# EAGLE board Main Board (EAGLE 9.0.0)
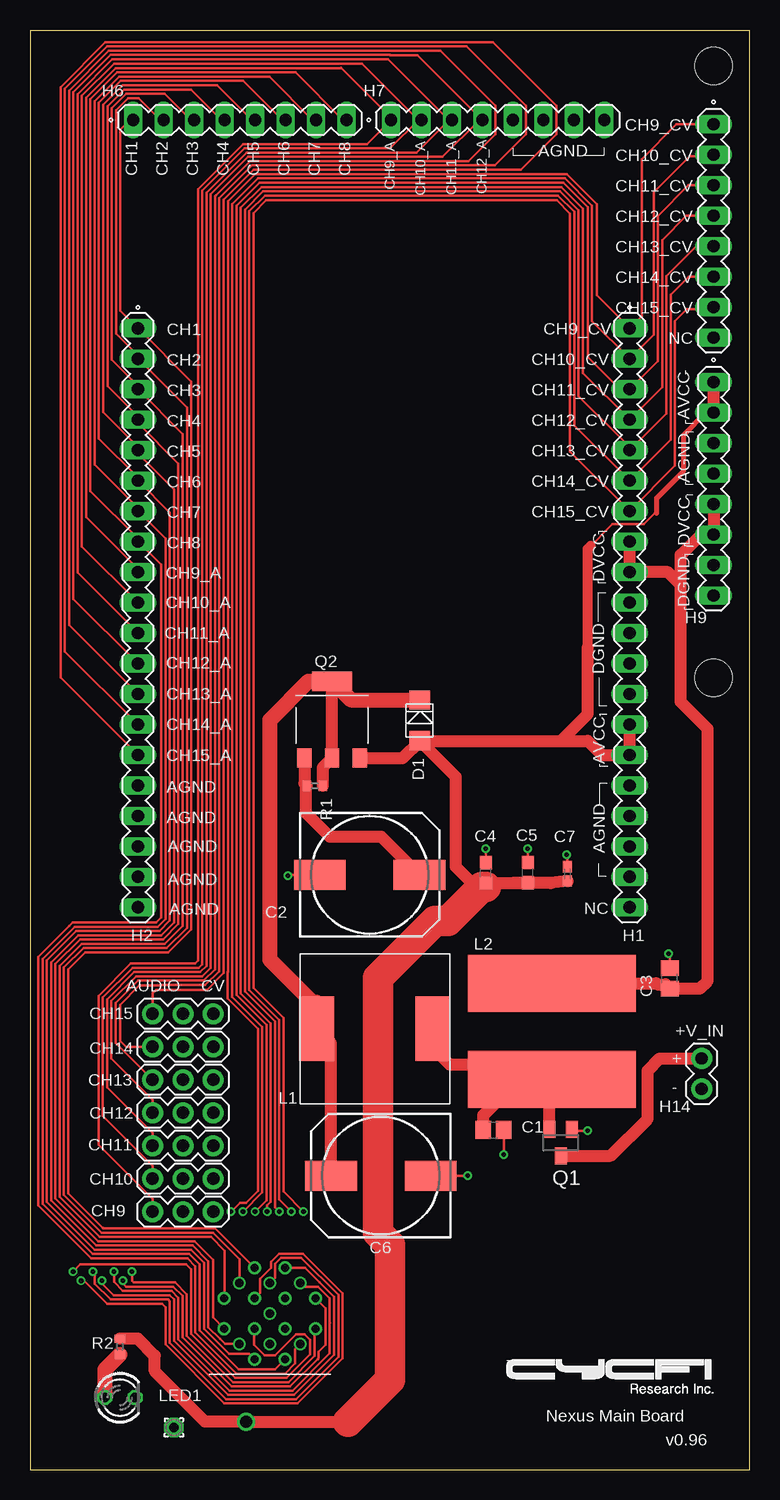
[diagram p0: board, top side]
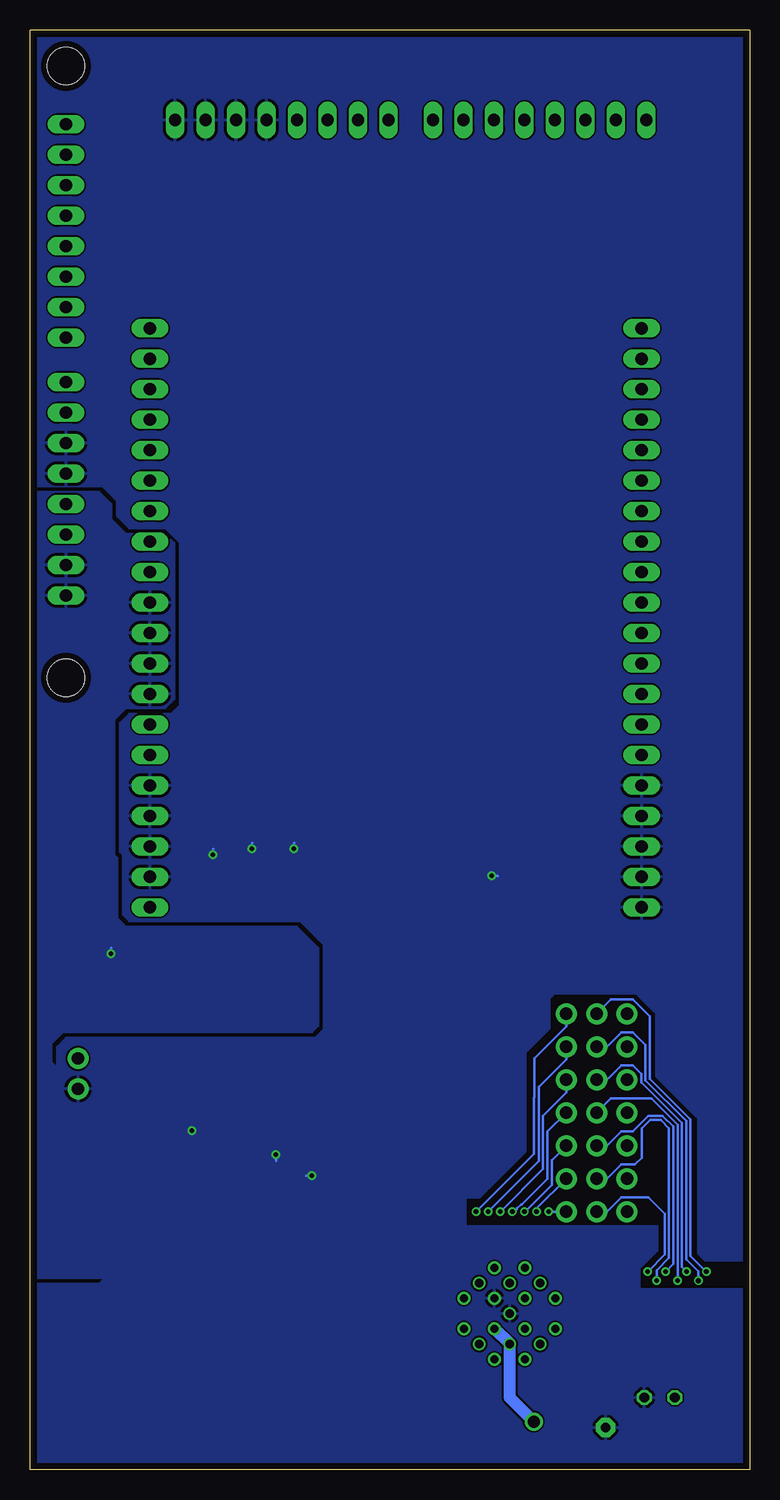
[diagram p1: board, bottom side, seen from below]

Size 60 x 120 mm. Coordinates in mm from the lower left corner, seen from the top.
Outline: 0,0 60,0 60,120 0,120 0,0
Copper layers (1*16): Top 0.035mm / dielectric 1.6mm / Bottom 0.035mm
Design rules "Elecrow_2-layer_PCB_eagle_rule": minimum track width 6mil, minimum drill 12mil, track to track 6mil, track to pad 6mil, pad to pad 6mil, via to via 8mil, smd to smd 0mil, copper to edge 20mil, drill to drill 10mil, minimum pad ring 6mil, minimum via ring 6mil, stop-mask expansion 0mil, vias tented up to drill 100mil, thermal gap 10mil
Holes 3.1 mm at 57,117 57,66

## Footprints (pad centres in the part's own frame; a part is rotated, then mirrored left to right if it is on the bottom)
C0805 = smd 1.3 x 1.5: 1 -0.85,0; 2 0.85,0
140CLH-1010 = smd 4.3 x 2.5: + 4.15,0; - -4.15,0
C0603 = smd 1.1 x 1: 1 -0.85,0; 2 0.85,0
C0402K = smd 0.925 x 0.74: 1 -0.6,0; 2 0.6,0
19PIN_LEMO = drill 0.7: P$1 -3.81,-1.27; P$2 -2.54,-2.54; P$3 -1.27,-3.81; P$4 1.27,-3.81; P$5 2.54,-2.54; P$6 3.81,-1.27; P$7 3.81,1.27; P$8 2.54,2.54; P$9 1.27,3.81; P$10 -1.27,3.81; P$11 -2.54,2.54; P$12 -3.81,1.27; P$13 -2.54,0; P$14 -1.27,-1.27; P$15 1.27,-1.27; P$16 2.54,0; P$17 1.27,1.27; P$18 -1.27,1.27; P$19 0,0
SMX = smd 1.6 x 1.68: ANODE 0,0; CATHODE 3.4,0
TH-PAD-1.6/0.8 = drill 0.813 pad 1.6 octagon: 1 0,0
MA20-1 = drill 1.016 long: 1 -24.13,0; 2 -21.59,0; 3 -19.05,0; 4 -16.51,0; 5 -13.97,0; 6 -11.43,0; 7 -8.89,0; 8 -6.35,0; 9 -3.81,0; 10 -1.27,0; 11 1.27,0; 12 3.81,0; 13 6.35,0; 14 8.89,0; 15 11.43,0; 16 13.97,0; 17 16.51,0; 18 19.05,0; 19 21.59,0; 20 24.13,0
MA03-1_ = drill 1.016 pad 1.75: 1 -2.54,0; 2 0,0; 3 2.54,0
MA08-1 = drill 1.016 long: 1 -8.89,0; 2 -6.35,0; 3 -3.81,0; 4 -1.27,0; 5 1.27,0; 6 3.81,0; 7 6.35,0; 8 8.89,0
MA02-1 = drill 1.016 pad 1.75: 1 -1.27,0; 2 1.27,0
SDR = smd 4.75 x 14: P$1 -4,-0.5; P$2 4,-0.5
L1280 = smd 2.9 x 5.4: P$1 -4.85,0; P$2 4.85,0
LED3MM = drill 0.813 octagon: A -1.27,0; K 1.27,0
SOT23 = smd 1 x 1.4: 1 -0.95,-1.1; 2 0.95,-1.1; 3 0,1.1
SOT-223-4 = smd 1.2 x 1.6: P$1 -2.3,-3.2; P$2 0,-3.2; P$3 2.3,-3.2 | smd 3.3 x 1.6: P$4 0,3.2
R0402 = smd 0.7 x 0.9: 1 -0.65,0; 2 0.65,0

## Placement (x,y rotation side)
C1  22uF  [C0805]  38.65,28.32 0 top
C2  470uF  [140CLH-1010]  28.33,49.57 0 top
C3  22uF  [C0805]  53.34,40.95 90 top
C4  1uF  [C0603]  38.01,49.74 90 top
C5  10uF  [C0603]  41.5,49.76 90 top
C6  1000uF  [140CLH-1010]  29.25,24.5 180 top
C7  1nF  [C0402K]  44.82,49.65 90 top
CN1  19PIN_LEMO  [19PIN_LEMO]  20,13 270 top
D1  FM4004W  [SMX]  32.5,60.75 90 top
GND  [TH-PAD-1.6/0.8]  12,3.5 0 top
H1  [MA20-1]  50,71 270 top
H2  [MA20-1]  9,71 270 top
H3  [MA03-1_]  12.75,32.5 0 top
H4  [MA03-1_]  12.75,35.25 0 top
H5  [MA03-1_]  12.75,38 0 top
H6  [MA08-1]  17.5,112.5 0 top
H7  [MA08-1]  39,112.5 0 top
H8  [MA08-1]  57,103.25 270 top
H9  [MA08-1]  57,81.75 270 top
H10  [MA03-1_]  12.75,21.5 0 top
H11  [MA03-1_]  12.75,24.25 0 top
H12  [MA03-1_]  12.75,27 0 top
H13  [MA03-1_]  12.75,29.75 0 top
H14  MA02-1  [MA02-1]  56,33 90 top
L1  1mH  [SDR]  43.02,36.52 90 top
L2  82uH  [L1280]  28.75,36.75 180 top
LED1  [LED3MM]  7.5,6 0 top
Q1  DMP3099L  [SOT23]  44.25,27.25 180 top
Q2  DSS6060  [SOT-223-4]  25.19,62.51 0 top
R1  1k  [R0402]  23.75,57 0 top
R2  4.7k  [R0402]  7.5,10.25 270 top

## Library data of the parts
C1-C7 L2 R1 R2 = resistor
CN1 GND = CYCFI_Con
D1 = CYCFI_diode
H1 H2 H6-H9 = con-lstb; OC_FARNELL: unknown; OC_NEWARK: unknown
H3-H5 H10-H14 = con-lstb
L1 = inductors
LED1 = led
Q1 Q2 = CYCFI_semicon

## Nets
+AVCC: C4.1 C5.1 C7.1 CN1.P$16 CN1.P$17 D1.ANODE H1.14 H1.15 H9.1 H9.2 Q2.P$3 R2.1
+DVCC: C3.1 H1.8 H1.9 H9.5 H9.6 L1.P$2
GND: C1.2 C2.- C3.2 C4.2 C5.2 C6.- C7.2 CN1.P$18 CN1.P$19 GND.1 H1.10 H1.11 H1.12 H1.13 H1.16 H1.17 H1.18 H1.19 H2.16 H2.17 H2.18 H2.19 H2.20 H7.5 H7.6 H7.7 H7.8 H9.3 H9.4 H9.7 H9.8 H14.1 LED1.K Q1.1
N$1: H2.13 H3.1
N$2: H14.2 Q1.3
N$3: H2.14 H4.1
N$4: CN1.P$1 H2.1 H6.1
N$5: CN1.P$2 H2.2 H6.2
N$6: CN1.P$3 H2.3 H6.3
N$7: CN1.P$4 H2.4 H6.4
N$8: CN1.P$5 H2.5 H6.5
N$9: H1.1 H8.1 H10.3
N$10: CN1.P$6 H2.6 H6.6
N$11: CN1.P$7 H2.7 H6.7
N$12: CN1.P$8 H2.8 H6.8
N$13: CN1.P$9 H10.2
N$14: CN1.P$10 H11.2
N$15: CN1.P$11 H12.2
N$16: CN1.P$12 H13.2
N$17: H2.15 H5.1
N$18: H2.10 H7.2 H11.1
N$19: C1.1 L1.P$1 L2.P$1 Q1.2
N$20: C2.+ Q2.P$1 R1.1
N$21: C6.+ D1.CATHODE L2.P$2 Q2.P$2 Q2.P$4 R1.2
N$25: LED1.A R2.2
N$26: H1.3 H8.3 H12.3
N$27: H1.2 H8.2 H11.3
N$28: H2.12 H7.4 H13.1
N$29: H2.11 H7.3 H12.1
N$30: H1.4 H8.4 H13.3
N$32: H2.9 H7.1 H10.1
N$33: H1.5 H3.3 H8.5
N$34: H1.6 H4.3 H8.6
N$35: H1.7 H5.3 H8.7
N$36: CN1.P$13 H3.2
N$37: CN1.P$14 H4.2
N$38: CN1.P$15 H5.2

## Tracks (layer width: path | path; a pad name or v marks a point on that pad's centre or on a via)
+AVCC  (via drill 1)
  Top 0.203: 46.5,76.75 48.57,78.82 51.2,78.82 52.11,79.73 52.25,79.73
  Top 0.406: 52.25,79.73 52.25,81 54.5,83.25 54.5,86.25 56.35,88.1 H9.2 | 57,90.5 H9.1
  Top 0.813: 46.5,68.5 46.5,76.75 46.75,77
  Top 1.016: 40.23,48.89 C5.1 | C7.1 43.41,48.89 40.23,48.89 | C4.1 36.86,48.89 35.5,50.25 35.5,57.75 D1.ANODE | Q2.P$3 31.06,59.31 D1.ANODE | D1.ANODE 44.25,60.75 | 44.25,60.75 46.5,60.75 47.68,59.57 H1.15 H1.14 | H9.2 57,90.5 | 26.5,4 v18,4 14.6,4 10.4,8.2 10.4,9.5 9,10.9 R2.1 | C4.1 40.23,48.89 | C4.1 37.69,48.57 | 44.25,60.75 46.5,63 46.5,68.5
  Top 2.54: 26.5,4 30,7.5 30,18.75 29,19.75 29,41 33.75,45.75 34.87,45.75 37.69,48.57 38.01,48.57
  Bottom 1.016: v18,4 20,6 CN1.P$16 CN1.P$17
+DVCC
  Top 1.016: H9.5 H9.6 56.06,77.94 56,78 54.25,76.25 54.25,73.75 | L1.P$2 52.2,40.52 52.29,40.44 53,40.44 C3.1 55.85,40.1 56.5,40.75 56.5,61.75 54.25,64 54.25,73.75 | 54.25,73.75 53.19,74.81 H1.9 H1.8
GND  (via drill 0.4)
  Top 0.203: C1.2 v39.5,26.25 | C6.- v36.5,24.5 | Q1.1 45.3,28.25 v46.5,28.25 | C3.2 53.34,42.91 v53.25,43 | C2.- 21.57,49.57 v21.5,49.5 | C4.2 v38.01,51.74 v38,51.75 | C5.2 v41.5,51.75 | C7.2 44.82,51.18 v44.75,51.25
  Bottom 0.203: v39.5,26.25 39.5,25.75 | v36.5,24.5 37,24.5 | v46.5,28.25 46.75,28.25 | v53.25,43 53.25,43.5 | v21.5,49.5 21,49.5 | v38,51.75 38,52.25 | v41.5,51.75 41.5,52.25 | v44.75,51.25 44.75,51.75
  pour Bottom: 0,0 60,0 60,15.5 54.25,15.5 54,15.75 52.5,17.25 52.5,17.5 52.5,32.25 53.25,33 57.25,33 57.75,33.5 57.75,35.25 57.25,35.75 57,36 56.5,36 36.25,36 35.5,36.75 35.5,43.75 36,44.25 37.5,45.75 50.5,45.75 51.75,45.75 52.25,46.25 52.25,51.25 52.5,51.5 52.5,62.25 51.75,63 48.25,63 47.5,63.75 47.5,77.25 48.75,78.5 51.75,78.5 52.75,79.5 52.75,80.75 54,82 55.25,82 60,82 60,120 0,120
  pour Bottom: 60,16 53.75,16 53.5,16.25 52.5,17.25 52.5,32.25 53.25,33 57.25,33 58.25,34 58.25,34.5 58.25,35.5 57.25,36.5 36.5,36.5 36,37 36,39 36,43.5 37.75,45.25 52,45.25 52.75,46 52.75,48 52.75,51 53,51.25 53,56.75 53,62.5 52,63.5 48.75,63.5 48.25,64 48,64.25 48,66.5 48,77.25 48.75,78 51.75,78 52,78 53.25,79.25 53.25,79.5 53.25,80.5 54.25,81.5 60,81.5
N$1
  Top 0.203: 9,64.92 H2.13 3.26,70.39 3.26,114.95 6.58,118.27 34.23,118.27 38.8,113.7 38.8,111.3 36.58,109.08 18.34,109.08 15.51,106.24 | 15.42,106.16 15.51,106.24 | 15.51,106.24 15.51,106.23 15.42,106.15 15.42,41.68 14.5,40.75 10.75,40.75 | 10.75,40.75 | H3.1 7.14,35.57 7.14,38.9 9,40.75 10.75,40.75
N$2
  Top 1.016: 56.02,34.25 H14.2 52.52,34.27 51.5,33.25 51.5,29.25 48.4,26.15 Q1.3
N$3
  Top 0.203: H2.14 2.9,68.21 2.9,115.1 6.43,118.63 36.41,118.63 41.34,113.7 41.34,111.3 38.76,108.72 18.5,108.72 15.78,106 15.78,41.53 14.62,40.38 10.88,40.38 10.86,40.36 9.11,40.36 7.5,38.75 7.5,35.75 8,35.25 H4.1
N$4
  Top 0.203: 8.55,112.44 H6.1 8.33,112.5 7.53,111.7 7.53,96.6 H2.1 13.44,90.69 13.44,46.2 13.44,45.52 13.44,45.02 11.53,43.11 4.61,43.11 3.19,41.69 3.19,23.04 6.08,20.14 | 6.08,20.14 6.11,20.14 | 6.08,20.14 6.12,20.1 15.44,20.1 CN1.P$1
N$5
  Top 0.203: H6.2 10.88,112.5 9.05,114.33 8.17,114.33 7.17,113.33 7.17,94.69 9,92.86 H2.2 13.08,88.51 13.08,46.1 13.08,45.67 13.08,45.17 11.38,43.47 4.46,43.47 2.83,41.83 2.83,22.89 5.97,19.74 15.26,19.74 17.46,17.54 CN1.P$2
N$6
  Top 0.203: H6.3 13.42,112.5 11.24,114.68 8.02,114.68 6.82,113.48 6.82,92.5 9,90.32 H2.3 12.73,86.32 12.73,46.1 12.73,45.81 12.73,45.31 11.24,43.82 4.32,43.82 2.48,41.98 2.48,22.74 5.83,19.39 15.11,19.39 16.25,18.25 16.25,14.33 CN1.P$3
N$7
  Top 0.203: H6.4 15.96,112.5 13.42,115.04 7.87,115.04 6.46,113.63 6.46,90.32 9,87.78 H2.4 9,87.24 12.37,83.87 12.37,46.6 12.37,45.96 12.37,45.46 11.09,44.18 4.17,44.18 2.12,42.13 2.12,22.59 5.68,19.03 13.72,19.03 15.25,17.5 15.25,12.67 CN1.P$4
N$8
  Top 0.203: H6.5 18.5,112.5 15.61,115.4 7.73,115.4 6.1,113.77 6.1,88.14 9,85.24 H2.5 9,84.7 12.02,81.68 12.02,46.4 12.02,46.11 12.02,45.61 10.94,44.53 4.02,44.53 1.76,42.28 1.76,22.45 5.53,18.68 13.57,18.68 14.87,17.37 14.87,11.87 15.85,10.9 16.29,10.46 CN1.P$5
N$9  (via drill 0.4)
  Top 0.203: H8.1 53.89,112.14 51,109.25 51,96.13 H1.1 47.25,97.88 47.25,105.5 44.77,107.98 18.77,107.98 16.5,105.72 16.5,41.5 16.49,41.49 16.49,39.26 19,36.75 19,23.25 18,22.25 17.5,22.25 v16.75,21.5
  Bottom 0.203: H10.3 v16.75,21.5
N$10
  Top 0.203: 21.61,112.2 21.34,112.2 17.79,115.75 7.58,115.75 5.75,113.92 5.75,85.95 9,82.7 H2.6 11.66,79.77 11.66,45.76 10.79,44.89 3.87,44.89 1.41,42.42 1.41,22.3 5.38,18.32 13.42,18.32 14.5,17.24 14.5,13 14.52,12.98 14.52,11.73 16.61,9.63 18.29,9.63 CN1.P$6 | 21.75,112.2 21.61,112.2 | 21.61,112.2 H6.6
N$11
  Top 0.203: H6.7 23.58,112.5 19.97,116.11 7.43,116.11 5.39,114.07 5.39,83.77 9,80.16 H2.7 11.31,77.58 11.31,45.9 10.65,45.24 3.73,45.24 1.05,42.57 1.05,22.15 5.24,17.97 13.28,17.97 14.14,17.1 14.14,11.6 17.38,8.36 20.44,8.36 CN1.P$7
N$12
  Top 0.203: 10.93,75.42 H2.8 9,77.62 5.04,81.58 5.04,114.22 7.28,116.46 22.16,116.46 26.12,112.5 H6.8 | 10.93,75.42 10.95,75.4 | CN1.P$8 22.1,10.02 22.1,8.85 21.25,8 17.24,8 13.79,11.45 13.79,16.95 13.13,17.61 5.09,17.61 0.7,22 0.7,42.72 3.29,45.31 3.58,45.6 10.5,45.6 10.93,46.02 10.93,75.42
N$13  (via drill 0.4)
  Top 0.203: v8.5,16.5 8.5,15.75 8.64,15.61 12.09,15.61 13.08,14.62 13.08,11.15 16.94,7.29 21.55,7.29 23.73,9.47 23.73,11.64 CN1.P$9
  Bottom 0.203: H10.2 11.88,21.5 10.7,22.68 8.43,22.68 7.07,21.32 7.07,17.93 v8.5,16.5
N$14  (via drill 0.4)
  Top 0.203: CN1.P$10 24.64,13.44 24.64,10.39 24.08,9.83 24.08,9.32 24,9.24 24,9.2 23.96,9.2 21.7,6.93 16.8,6.93 12.72,11.01 12.72,14.47 11.95,15.25 8,15.25 7.75,15.5 v7.75,15.75
  Bottom 0.203: H11.2 11.88,24.25 10.7,25.43 9.57,25.43 9,26 9,28.43 8.28,29.14 7.4,29.14 6.71,28.45 6.71,17.65 7.75,16.61 v7.75,15.75
N$15  (via drill 0.4)
  Top 0.203: CN1.P$11 22.83,15.25 24,15.25 25,14.26 25,12.26 25,12.25 25,12.24 25,10.5 25,10.23 25,9.69 21.88,6.58 16.65,6.58 12.37,10.86 12.37,14.33 11.8,14.89 7.75,14.89 7,15.64 v7,16.5
  Bottom 0.203: H12.2 11.88,27 10.7,28.18 9.75,28.18 | 9.72,28.18 9.75,28.18 | v7,16.5 6.36,17.14 6.36,28.6 7.25,29.5 8.43,29.5 9.75,28.18
N$16  (via drill 0.4)
  Top 0.203: 25.36,10.09 25.36,11 | 25.36,11 25.36,14.4 24.15,15.61 24.14,15.61 22.94,16.81 CN1.P$12 | v6,15.75 6,15.5 6.96,14.54 11.65,14.54 12.01,14.18 12.01,10.71 16.5,6.22 22.03,6.22 25.35,9.54 25.35,10.99 25.36,11
  Bottom 0.203: H13.2 11.57,30.93 8.18,30.93 6,28.75 v6,15.75
N$17
  Top 0.203: H2.15 2.55,66.02 2.55,115.25 6.29,118.98 38.6,118.98 43.88,113.7 43.88,111.3 40.95,108.37 18.65,108.37 16.14,105.86 | 16.13,105.85 16.14,105.86 | H5.1 10.21,39.71 10.5,40 14.75,40 16.13,41.38 16.13,43.63 16.14,43.64 16.14,105.86
N$18
  Top 0.203: 32.38,112.5 32.31,112.56 | 32.31,112.56 27.68,117.21 7.02,117.21 4.33,114.51 4.33,76.94 H2.10 | 32.31,112.56 32.59,112.56 H7.2 32.38,112.5 | 32.38,112.5 30.02,110.14 17.9,110.14 14.36,106.6 14.36,42.12 14.05,41.82 8.56,41.82 6.08,39.34 6.08,29.46 10.21,25.33 H11.1 10.25,24.29
N$19
  Top 1.016: L1.P$1 45.75,34.27 42.77,34.27 | C1.1 37.8,29.55 40.75,32.5 43.25,32.5 | 43.5,32.5 45.5,32.5 | L1.P$1 42.3,33.75 35,33.75 33,35.75 33,36.15 L2.P$1 | Q1.2 43.3,32.45 43.25,32.5 | L1.P$1 43.5,32.5 | 43.5,32.5 43.25,32.5
N$20
  Top 1.016: Q2.P$1 22.89,57.21 23,57.1 | 23,57.1 R1.1 | C2.+ 29.3,52.75 25,52.75 23,54.75 23,57.1
N$21
  Top 0.203: R1.2 24.4,57.15 | 25,65.71 Q2.P$4
  Top 1.016: C6.+ 25.1,35.55 L2.P$2 23.9,39.1 | R1.2 24.4,58.52 Q2.P$2 Q2.P$4
  Top 1.27: L2.P$2 23.9,38.6 20,42.5 20,62.5 23.21,65.71 25,65.71 | Q2.P$4 26.75,64.15 D1.CATHODE
N$22
  cutout Bottom: 3.25,15.25 9,15.25 9,16.75 7.5,18.25 7.5,20.5 23.5,20.5 23.5,22.5 22.5,22.5 21.75,23.25 18.5,26.5 18.5,27.75 18.5,34.75 16.5,36.75 16.5,39.25 16.25,39.5 12.25,39.5 9.5,39.5 8,38 8,32.75 4.5,29.25 4.5,28.25 4.5,18 3.75,17.25 3,17.25 3,15.25
N$23
  cutout Bottom: 3,17.25 0,17.25 0,15.25 3,15.25
N$25
  Top 1.27: R2.2 6.23,8.33 LED1.A
N$26  (via drill 0.4)
  Top 0.203: H8.3 54.92,107.06 52.36,104.5 52.36,92.41 H1.3 49.2,90.05 46.52,92.73 46.52,105.23 44.47,107.27 19.15,107.27 17.21,105.34 17.21,41.25 17.21,41.19 17.21,39.55 19.71,37.05 19.71,26.25 19.71,26 19.71,22.44 v18.77,21.5
  Bottom 0.203: H12.3 16.5,25.79 16.5,23.75 18.75,21.5 v18.77,21.5
N$27  (via drill 0.4)
  Top 0.203: H8.2 56.9,109.5 55,109.5 52,106.5 52,94.59 H1.2 46.87,95.72 46.87,105.37 44.62,107.63 19,107.63 16.86,105.48 16.86,39.4 19.36,36.9 19.36,23.1 v17.76,21.5
  Bottom 0.203: H11.3 17.76,21.78 v17.76,21.5
N$28
  Top 0.203: 9,67.46 H2.12 3.62,72.58 3.62,114.81 6.73,117.92 30.01,117.92 30.01,117.91 32.32,117.91 H7.4 37.46,112.5 34.39,109.43 18.19,109.43 15.07,106.31 15.07,41.83 14.35,41.11 8.85,41.11 6.79,39.05 6.79,34.25 10.21,30.83 H13.1
N$29
  Top 0.203: 34.92,112.5 29.86,117.56 6.87,117.56 3.97,114.66 3.97,74.76 H2.11 | 34.92,112.5 H7.3 | 34.92,112.5 32.21,109.79 18.05,109.79 14.71,106.45 14.71,41.97 14.2,41.46 11,41.46 10.75,41.46 8.71,41.46 6.43,39.19 6.43,31.86 10.21,28.08 H12.1
N$30  (via drill 0.4)
  Top 0.203: H8.4 54.73,104.52 52.71,102.5 52.71,90.22 H1.4 46.12,91.39 46.12,105.12 44.33,106.92 19.3,106.92 17.57,105.19 17.57,39.69 20.07,37.19 20.07,26.25 20.07,26 20.07,22.3 19.78,22.01 v19.78,21.5
  Bottom 0.203: H13.3 16.86,28.18 16.86,24.25 19,22.11 19.02,22.11 19.38,21.75 19.38,21.73 19.61,21.5 v19.78,21.5
N$32
  Top 0.203: H2.9 9,75.08 4.68,79.4 4.68,114.36 7.14,116.82 25.92,116.82 25.95,116.85 30.11,112.69 H7.1 28.11,110.5 17.75,110.5 14,106.75 14,42.42 13.75,42.17 8.41,42.17 5.72,39.49 5.72,27.07 10.21,22.58 H10.1
N$33  (via drill 0.4)
  Top 0.203: H8.5 55.55,101.98 53.07,99.5 53.07,88.04 H1.5 50,85.24 45.74,89.5 45.74,104.99 44.18,106.56 19.44,106.56 17.92,105.04 17.92,41 17.92,40.89 17.92,39.84 20.42,37.34 20.42,21.87 v20.79,21.5
  Bottom 0.203: v20.79,21.5 17.21,25.08 17.21,29.5 15.29,31.42 H3.3
N$34  (via drill 0.4)
  Top 0.203: H8.6 54.94,99.44 53.42,97.92 53.42,85.85 H1.6 45.39,87.04 45.39,104.85 44.03,106.2 19.59,106.2 18.28,104.89 18.28,39.99 20.78,37.49 20.78,26.25 20.78,25.75 20.78,22.52 v21.8,21.5
  Bottom 0.203: H4.3 15.29,34.17 17.57,31.89 17.57,25.73 v21.8,21.5
N$35  (via drill 0.4)
  Top 0.203: H8.7 56.85,96.75 54.78,96.75 53.78,95.75 53.78,83.67 H1.7 45.03,84.86 45.03,104.7 43.93,105.81 19.69,105.81 18.63,104.75 18.63,40.75 18.63,40.6 18.63,40.13 21.13,37.63 21.13,26.25 21.13,26 21.13,23.17 v22.81,21.5
  Bottom 0.203: H5.3 15.29,36.92 17.92,34.29 17.92,31.08 18,31 18,26.31 v22.81,21.5
N$36  (via drill 0.4)
  Top 0.203: CN1.P$13 20.44,15.98 20.44,17.15 20.93,17.64 22.62,17.64 25.71,14.55 25.71,10.5 25.71,9.94 25.71,9.4 22.18,5.87 16.35,5.87 11.65,10.56 11.65,14.03 11.51,14.18 6.71,14.18 5.39,15.5 5.39,16.36 v5.25,16.5
  Bottom 0.203: H3.2 11.88,32.5 10.7,33.68 9.72,33.68 9.03,32.99 9.03,32.28 5.64,28.9 5.64,16.89 v5.25,16.5
N$37  (via drill 0.4)
  Top 0.203: 4.25,15.72 v4.26,15.74 4.51,15.74 6.42,13.83 11,13.83 11.3,13.53 11.3,10.42 16.21,5.51 22.32,5.51 26.07,9.26 26.07,9.8 26.07,10 26.07,14.7 22.77,18 21,18 20.78,18 20.09,17.3 20.09,16.8 19.17,15.88 19.17,14.71 CN1.P$14
  Bottom 0.203: v4.25,15.75 v4.26,15.74 4.26,16.51 5.29,17.54 5.29,29.05 8.68,32.43 8.68,35.38 9.72,36.43 10.7,36.43 11.88,35.25 H4.2
N$38  (via drill 0.4)
  Top 0.203: v3.6,16.5 4.21,17.11 8.75,17.11 8.76,17.1 13.03,17.1 13.43,16.7 13.43,11.3 17.09,7.64 21.4,7.64 23.37,9.61 23.37,10.8 22.88,11.29 22.2,11.29 20.44,9.53 19.56,9.53 18.7,10.39 18.7,10.8 18.7,11.7 CN1.P$15
  Bottom 0.203: H5.2 11.55,39.2 9.74,39.2 8.32,37.78 8.32,32.58 4.93,29.19 4.93,17.83 v3.6,16.5

## Text on the board
tNames: CH9_CV | CH1 | CH2 | CH3 | CH4 | CH5 | CH6 | CH7 | CH8 | CH9_A | CH10_A | CH11_A | CH12_A | CH10_CV | AGND | CH11_CV | CH12_CV | CH13_CV | CH14_CV | CH15_CV | CH1 | CH9_CV | NC | CH2 | CH10_CV | CH3 | CH11_CV | CH4 | AVCC | CH12_CV | CH5 | CH13_CV | CH6 | CH14_CV | AGND | CH7 | CH15_CV | CH8 | DVCC | CH9_A | DVCC | CH10_A | DGND | CH11_A | CH12_A | Q2 | DGND | CH13_A | CH14_A | CH15_A | AVCC | AGND | AGND | AGND | AGND | AGND | NC | AGND | L2 | AUDIO | CV | CH15 | CH14 | +V_IN | + | CH13 | - | CH12 | L1 | H14 | CH11 | CH10 | CH9 | Nexus Main Board | v0.96